# Altium PCB 四轴0617.PcbDoc
Units mm, origin at the board's own origin, x right, y up, seen from the top; angles counter-clockwise.
Board outline 152.4 x 101.6 mm, 2 copper layers (Top Layer, Bottom Layer); 70 components, 44 nets, 226 pads, 102 vias.
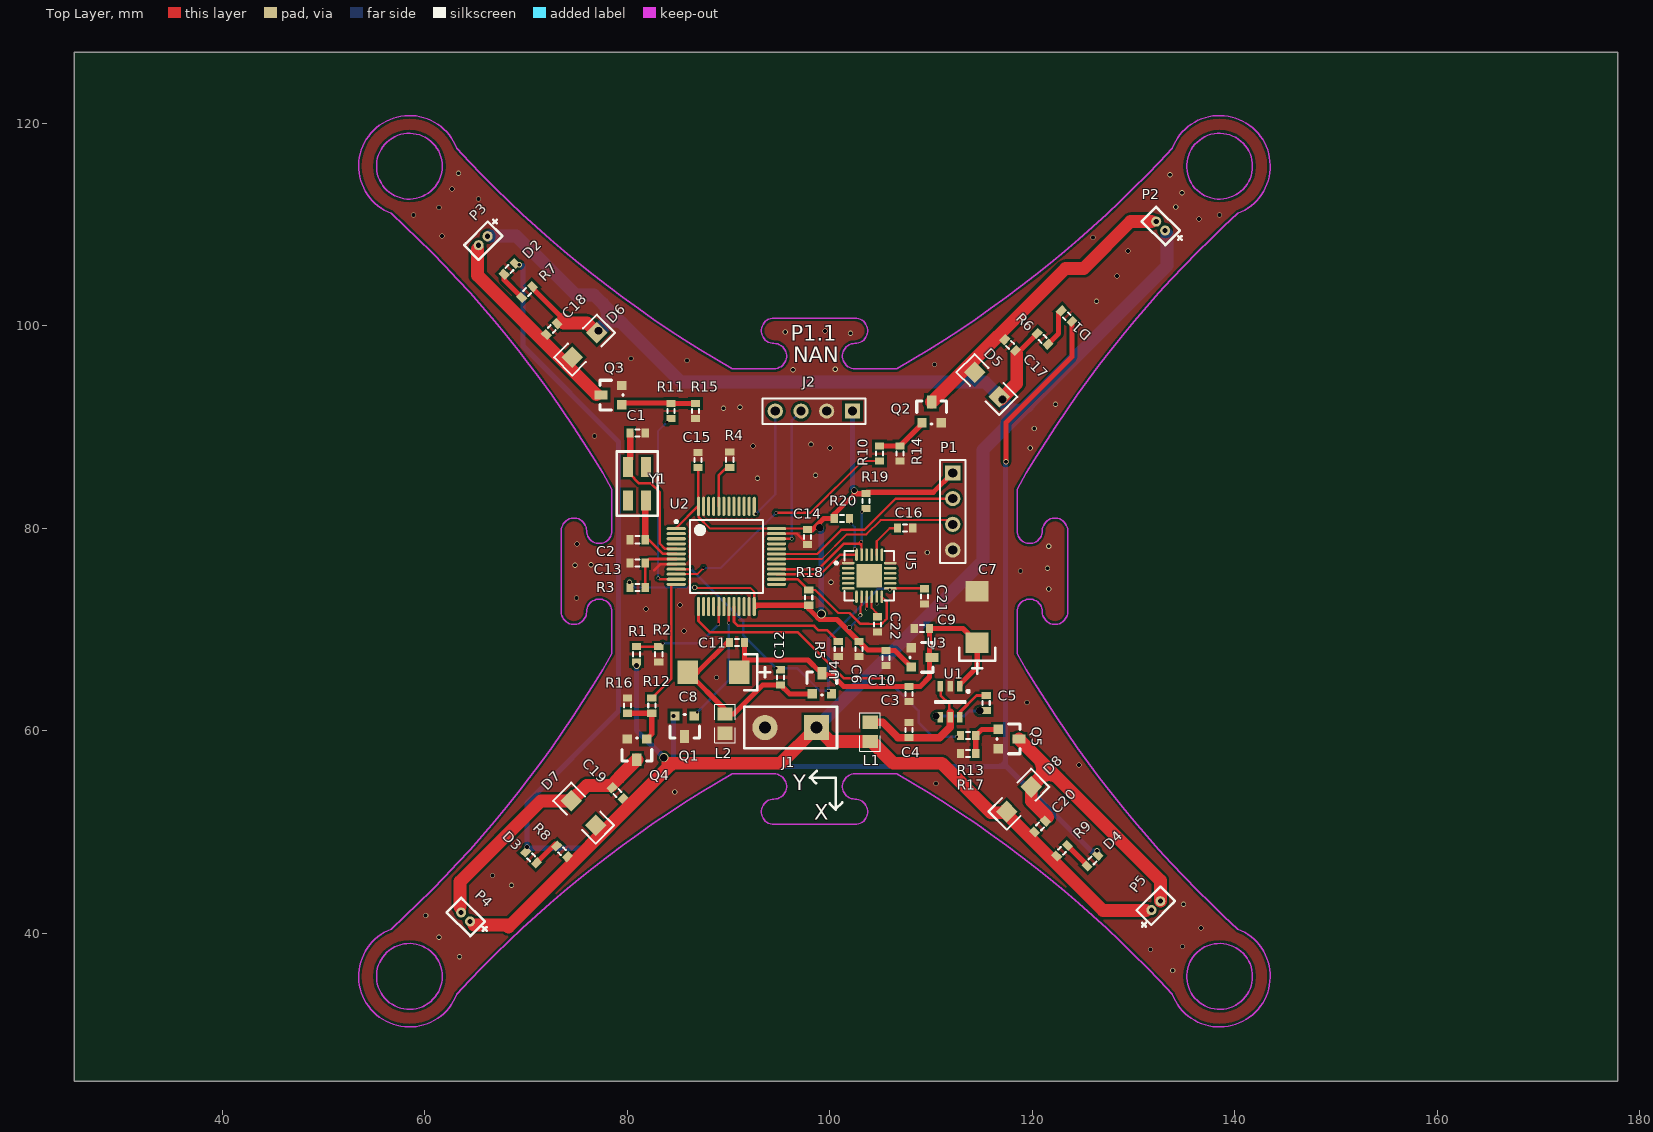
[diagram p0: Top Layer view]
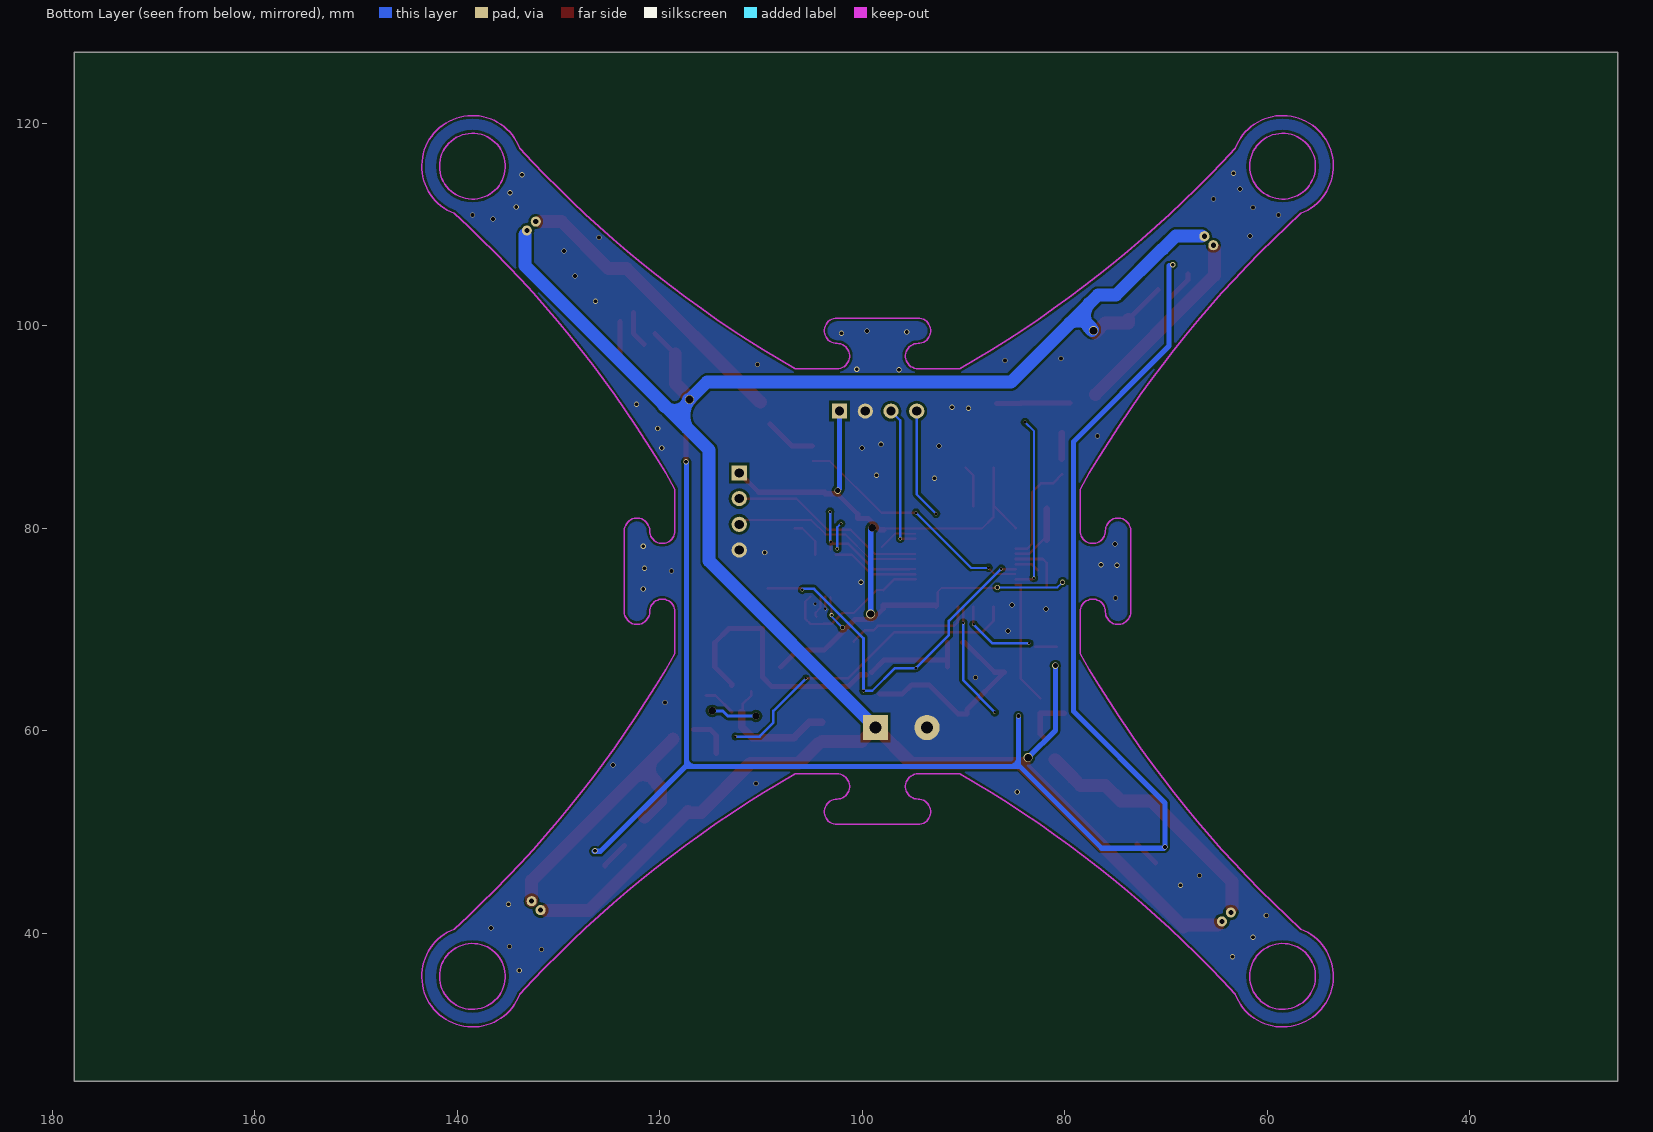
[diagram p1: Bottom Layer view, seen from below]

## Layer stack, top to bottom
Top Layer: signal copper 0.0356
Dielectric: dielectric 0.32, FR-4, Dk 4.8
Bottom Layer: signal copper 0.0356

## Board outline
25.4,25.4 177.8,25.4 177.8,127 25.4,127

## Design rules (kind name [scope] priority, off if disabled: settings)
Clearance [All] p1: gap=0.254
PolygonConnect [All] p1: connectstyle=Direct reliefconductorwidth=0.254 reliefentries=4 polygonreliefangle="90 Angle" airgapwidth=0.254
RoutingVias [All] p1: holewidth=0.711 width=1.27 viastyle="Through Hole" minholewidth=0.711 minwidth=1.27 maxholewidth=0.711 maxwidth=1.27
SolderMaskExpansion [All] p1: expansion=0.102
Width [All] p1: maxlimit=2.54 minlimit=0.127 preferedwidth=0.254
28 further rules are at their usual default settings.

## Components (designator, comment, footprint, x,y, rotation, side; value= is the part's Value field where it differs from the comment)
C1 "Cap" J1-0603 81.026,89.408 r180 top
C2 "Cap" J1-0603 81.026,78.867 r0 top
C3 "Cap" J1-0603 107.814,63.627 r90 top
C4 "Cap" J1-0603 107.814,60.071 r270 top
C5 "Cap" J1-0603 115.443,62.738 r90 top
C6 "Cap" J1-0603 102.87,68.072 r90 top
C7 "16v" 6032 114.554,68.707 r90 top
C8 "16V" 6032 91.059,65.786 r180 top
C9 "Cap" J1-0603 109.093,70.104 r0 top
C10 "Cap" J1-0603 105.537,67.183 r90 top
C11 "Cap" J1-0603 90.83,68.732 r0 top
C12 "Cap" J1-0603 95.123,65.278 r90 top
C13 "Cap" J1-0603 81.026,76.581 r180 top
C14 "Cap" J1-0603 97.79,79.146 r90 top
C15 "Cap" J1-0603 86.995,86.741 r270 top
C16 "Cap" J1-0603 107.442,80.01 r0 top
C17 "Cap" J1-0603 117.805,98.095 r315 top
C18 "Cap" J1-0603 72.542,99.67 r45 top
C19 "Cap" J1-0603 79.045,53.848 r315 top
C20 "Cap" J1-0603 120.752,50.546 r225 top
C21 "Cap" J1-0603 109.347,73.279 r90 top
C22 "Cap" J1-0603 104.699,70.51 r270 top
D1 "BLUDE" J1-0603 123.393,100.94 r315 top
D2 "BLUDE" J1-0603 68.377,105.613 r45 top
D3 "BLUDE" J1-0603 70.51,47.498 r135 top
D4 "BLUDE" J1-0603 125.933,47.193 r45 top
D5 "1N4148" 1206 114.3,95.402 r315 top
D6 "1N4148" 1206 74.574,96.876 r45 top
D7 "1N4148" 1206 74.473,53.086 r315 top
D8 "1N4148" 1206 119.888,54.458 r225 top
J1 "Battery" DIP2-5.08 98.679,60.325 r180 top
J2 "Header 4" HDR1X4 102.235,91.567 r180 top
L1 "Res1" 0805-1 103.988,59.893 r270 top
L2 "Res1" 0805-1 89.662,60.706 r270 top
P1 "Header 4" HDR1X4 112.141,85.471 r270 top
P2 "Header 2" DIP2-1.25 132.232,110.287 r315 top
P3 "Header 2" DIP2-1.25 65.329,107.95 r45 top
P4 "Header 2" DIP2-1.25 63.602,42.062 r315 top
P5 "Header 2" DIP2-1.25 132.639,43.18 r225 top
Q1 "8550" SOT23-8550 85.852,60.579 r180 top
Q2 "AO3402" SOT-23 110.109,92.456 r0 top
Q3 "AO3402" SOT-23 77.419,93.218 r90 top
Q4 "AO3402" SOT-23 80.899,57.15 r180 top
Q5 "AO3402" SOT-23 118.669,59.131 r270 top
R1 "Res1" J1-0603 80.924,67.564 r270 top
R2 "Res1" J1-0603 83.109,67.564 r90 top
R3 "Res1" J1-0603 81.026,74.168 r0 top
R4 "Res1" J1-0603 90.119,86.766 r270 top
R5 "Res1" J1-0603 100.838,68.072 r90 top
R6 "Res1" J1-0603 121.006,98.704 r135 top
R7 "Res1" J1-0603 70.104,103.327 r45 top
R8 "Res1" J1-0603 73.558,48.108 r315 top
R9 "Res1" J1-0603 122.936,48.158 r225 top
R10 "Res1" J1-0603 104.902,87.376 r270 top
R11 "Res1" J1-0603 84.328,91.579 r270 top
R12 "Res1" J1-0603 82.423,62.484 r90 top
R13 "Res1" J1-0603 113.665,59.538 r180 top
R14 "Res1" J1-0603 106.934,87.376 r90 top
R15 "Res1" J1-0603 86.741,91.579 r90 top
R16 "Res1" J1-0603 80.01,62.484 r270 top
R17 "Res1" J1-0603 113.665,57.76 r0 top
R18 "Res1" J1-0603 97.917,73.152 r90 top
R19 "Res1" J1-0603 103.581,82.702 r270 top
R20 "Res1" J1-0603 101.194,80.975 r0 top
U1 "LTC3200ES6-5" SOT95P245X110-6N 111.887,62.865 r270 top
U2 "TM32F103C8T6" LQFP48 89.789,77.216 r0 top
U3 "XC6202" SOT-23-NO 108.814,67.31 r270 top
U4 "XC6202" SOT-23-NO 99.162,64.414 r0 top
U5 "MPU6050-ALL" QFN50P440X440X80-24N 103.886,75.311 r0 top
Y1 "16MHz" 3225--crystal 79.705,84.023 r270 top

## Footprints (in the part's own frame and the unit in brackets; to place one, negate y for a bottom-side part, rotate by r counter-clockwise, add the part's x,y. Pads: shape width x height; smd on the part's side, far side on the other; paste and mask are expansions set on the pad)
0805-1 [mm] "贴片带丝印"
  rect 1.3x1.5 smd: 1(-0.95,0) 2(0.95,0)
  silkscreen extent -1.91,-1.02 1.91,1.02, body extent -1.14,-0.51 1.14,0.51, height 1
1206 [mil]
  rect 60x60 smd: 1(0,0) 2(135,0)
  silkscreen extent -50,-50 185,50
3225--crystal [mm]
  rect 2x1 smd: 1(-2.032,0.381) 2(1.27,2.159) ""(-2.032,2.159) ""(1.27,0.381)
  silkscreen extent -3.56,-0.76 2.79,3.3
6032 [mm]
  rect 2.03x2.28 smd: 1(0,0) 2(5.08,0)
  silkscreen extent -3.05,-1.78 -0.51,1.78
DIP2-1.25 [mm]
  round 1 hole 0.5: 1(0,0) 2(1.25,0)
  silkscreen extent -1.02,-1.02 3.05,1.02
DIP2-5.08 [mm]
  rect 2.5x2.5 hole 1.2: 1(0,0)
  round 2.5 hole 1.2: 2(5.08,0)
  silkscreen extent -2.03,-2.03 7.11,2.03
HDR1X4 [mm] "Connector; Header; 4 Position"
  rect 1.5x1.5 hole 0.9: 1(0,0)
  round 1.5 hole 0.9: 2(2.54,0) 3(5.08,0) 4(7.62,0)
  silkscreen extent -1.27,-1.27 8.89,1.27
J1-0603 [mm] "Chip Resistor, Body 1.6x0.8mm, IPC High Density"
  rect 0.7x0.9 smd: 1(-0.75,0) 2(0.75,0)
  silkscreen extent -0.2,-0.35 0.2,0.35, body extent -0.85,-0.48 0.85,0.48, height 0.9
LQFP48 [mm] "SQFP, 48-Leads, Body 7.00x7.00mm, Pitch 0.50mm, IPC Medium Density"
  oval 1.9x0.3 smd mask+0.09: 1(-4.95,2.75) 2(-4.95,2.25) 3(-4.95,1.75) 5(-4.95,0.75) 7(-4.95,-0.25) 9(-4.95,-1.25) 11(-4.95,-2.25) 26(4.95,-2.25) 28(4.95,-1.25) 30(4.95,-0.25) 32(4.95,0.75) 34(4.95,1.75) 36(4.95,2.75)
  oval 1.9x0.3 smd: 4(-4.95,1.25) 6(-4.95,0.25) 8(-4.95,-0.75) 10(-4.95,-1.75) 12(-4.95,-2.75) 25(4.95,-2.75) 27(4.95,-1.75) 29(4.95,-0.75) 31(4.95,0.25) 33(4.95,1.25) 35(4.95,2.25)
  oval 0.3x1.9 smd: 13(-2.75,-4.95) 15(-1.75,-4.95) 17(-0.75,-4.95) 19(0.25,-4.95) 21(1.25,-4.95) 23(2.25,-4.95) 38(2.25,4.95) 40(1.25,4.95) 42(0.25,4.95) 44(-0.75,4.95) 46(-1.75,4.95) 48(-2.75,4.95)
  oval 0.3x1.9 smd mask+0.09: 14(-2.25,-4.95) 16(-1.25,-4.95) 18(-0.25,-4.95) 20(0.75,-4.95) 22(1.75,-4.95) 24(2.75,-4.95) 41(0.75,4.95) 43(-0.25,4.95) 45(-1.25,4.95) 47(-2.25,4.95)
  oval 0.3x1.9 smd mask+0.082: 37(2.75,4.95) 39(1.75,4.95)
  silkscreen extent -5.07,-3.6 3.6,3.6, body extent -3.5,-3.5 3.5,3.5, height 2.45
QFN50P440X440X80-24N [mm]
  oval 1.25x0.25 smd: 1(-2.075,1.25) 2(-2.075,0.75) 3(-2.075,0.25) 4(-2.075,-0.25) 5(-2.075,-0.75) 6(-2.075,-1.25) 13(2.075,-1.25) 14(2.075,-0.75) 15(2.075,-0.25) 16(2.075,0.25) 17(2.075,0.75) 18(2.075,1.25)
  oval 0.25x1.25 smd: 7(-1.25,-2.075) 8(-0.75,-2.075) 9(-0.25,-2.075) 10(0.25,-2.075) 11(0.75,-2.075) 12(1.25,-2.075) 19(1.25,2.075) 20(0.75,2.075) 21(0.25,2.075) 22(-0.25,2.075) 23(-0.75,2.075) 24(-1.25,2.075)
  rect 2.5x2.3 smd: ""(0,0)
  silkscreen extent -3.37,-2.45 2.45,2.45
SOT23-8550 [mil]
  rect 36x36 smd: 1(45,-35) 2(-30,-35)
  rect 36x50 smd: 3(8,45)
  silkscreen extent -50,-40 65,50
SOT95P245X110-6N [mm] "SOT23, 6-Leads, Body 2.90x2.45mm, Pitch 0.95mm, IPC Medium Density"
  rect 1.05x0.55 smd: 1(-1.524,0.94) 2(-1.524,0) 3(-1.524,-0.965) 4(1.524,-0.965) 5(1.524,0) 6(1.524,0.965)
  silkscreen extent -1.15,-1.5 0.1,1.9, body extent -0.7,-1.5 0.7,1.5, height 1.1
SOT-23 [mil]
  rect 36x36 smd: 1(-40,-80) 3(35,-80)
  rect 36x50 smd: 2(-2,0)
  silkscreen extent -60,-85 55,5
SOT-23-NO [mil]
  rect 36x36 smd: 1(40,-30) 3(-35,-30)
  rect 36x50 smd: 2(3,50)
  silkscreen extent -55,-35 60,55

## Part data
C1 C2 C3 C4 C5 C6 C9 C10 C11 C12 C13 C14 C15 C16 C17 C18 C19 C20 C21 C22: "Capacitor"
C7 C8: library part "Cap Pol2", "Polarized Capacitor (Axial)"
D1 D2 D3 D4: library part LED0, "Typical INFRARED GaAs LED"
D5 D6 D7 D8: library part "Diode 1N4148", "High Conductance Fast Diode"
J1: "Multicell Battery"
J2 P1: "Header, 4-Pin"
L1 L2 R1 R2 R3 R4 R5 R6 R7 R8 R9 R10 R11 R12 R13 R14 R15 R16 R17 R18 R19 R20: "贴片电阻"
P2 P3 P4 P5: "Header, 2-Pin"
Q1: library part QNPN, "NPN Bipolar Transistor"
Q2 Q3 Q4 Q5: library part NMOS-2, "N-Channel Power MOSFET"
U2: library part LQFP48-STM32F103C8T6
Y1: library part XTAL, "Crystal Oscillator"

## Via types
v1: diameter 0.508, hole 0.381, Top Layer to Bottom Layer, 70 vias
v2: diameter 0.305, hole 0.254, Top Layer to Bottom Layer, 22 vias
v3: diameter 0.889, hole 0.762, Top Layer to Bottom Layer, 3 vias
v4: diameter 0.635, hole 0.508, Top Layer to Bottom Layer, 2 vias
v5: diameter 0.711, hole 0.711, Top Layer to Bottom Layer, 2 vias
v6: diameter 0.381, hole 0.254, Top Layer to Bottom Layer, 1 vias
v7: diameter 0.889, hole 0.711, Top Layer to Bottom Layer, 1 vias
v8: diameter 0.762, hole 0.711, Top Layer to Bottom Layer, 1 vias

## Nets (pads, with @x,y where several pads share a name; then routed paths per layer and width w, separated by ;. In a path a pad name is that pad's centre, name@x,y a point inside that pad or via, vN(x,y) a via of type N, cw(c..) or ccw(c..) an arc to the next point about the centre after c; other vN are vias at no path point)
1_RX: P1.2 U2.31 | length 19.7
  Top Layer w0.229: U2.31 98.751,77.466 101.143,79.858 103.429,79.858 106.502,82.931 P1.2
1_TX: P1.3 U2.30 | length 19.2
  Top Layer w0.178: U2.30 99.23,76.966 101.665,79.4 103.618,79.4 105.021,80.803 111.729,80.803 P1.3
3.3V: C6.2 C10.2 C14.2 C15.2 J2.1 P1.1 R3.1 R18.1 R19.1 R20.1 U2.1 U2.24 U2.36 U2.48 U3.1 U5.8 | length 88.2
  Top Layer w0.203: U2.1@84.839,79.972 U2.1@84.839,80.048 ; v1@86.665,74.117 86.69,74.092 92.177,74.092 92.539,73.729 U2.24 ; C15.2 C15.2@86.995,86 ; U2.48@87.033,82.166 87.033,81.115 88.182,79.966 U2.36 ; U2.36@94.739,79.972 97.625,79.972 C14.2@97.808,79.788 ; v6(103.022,71.425) 103.022,72.288 103.136,72.402 U5.8
  Top Layer w0.254: U2.1@84.839,80.048 86.995,82.204 C15.2
  Top Layer w0.508: 92.697,72.266 92.833,72.402 R18.1 97.917,72.06 98.806,71.171 ; C14.2@97.841,79.858 98.285,79.858 99.402,80.975 R20.1 100.444,81.394 102.464,83.414 R19.1@103.683,83.414 ; 98.99,70.987 100.705,70.987 101.746,69.946 C6.2 102.888,68.822 103.74,67.97 105.5,67.97 C10.2 106.413,67.933 U3.1 ; R19.1 103.682,83.553 110.223,83.553 P1.1
  Bottom Layer w0.203: v1@80.315,74.574 80.721,74.168 v1(86.665,74.168) ; v1(101.956,70.206) 103.073,71.323 v6@103.073,71.577
  Bottom Layer w0.508: v7(99.162,71.526) v8@99.162,79.959 ; J2.1 102.235,83.896 v4(102.413,83.718)
  other v1: 80.213,74.676
  other v8: 99.009,80.061
3_RX: U2.22
3_TX: U2.21
5V: C3.2 C7.1 C8.1 C9.2 C11.2 U1.1 U3.2 U4.2 | length 36.5
  Top Layer w0.508: C8.1@91.58,66.307 C11.2 ; 91.592,67.005 97.841,67.005 U4.2@99.06,65.786 ; U4.2@99.644,65.532 100.228,65.532 101.383,64.377 C3.2 108.929,64.377 109.855,65.303 U3.2@109.855,67.234 ; U3.2@109.843,67.246 C9.2 113.157,70.104 C7.1 114.554,66.294 112.878,64.618 U1.1@112.878,64.465
6050_INT: R18.2 U2.26 U5.12 | length 15.3
  Top Layer w0.178: 96.853,74.966 96.854,74.965
  Top Layer w0.229: R18.2 98.564,73.902 100.838,71.628 101.956,71.628 103.022,70.561 103.874,70.561 103.893,70.542 105.098,70.542 105.227,70.671 105.484,70.928 105.613,71.057 105.613,72.759 U5.12
  Top Layer w0.254: U2.26 96.853,74.966 ; 96.853,74.964 96.855,74.964 R18.2
6050_SCL: R19.2 U2.28 U5.23 | length 13
  Top Layer w0.178: U2.28 U2.28@95.301,75.966
  Top Layer w0.229: U2.28@95.301,75.966 98.877,75.966 101.397,78.486 102.718,78.486 102.881,78.486 103.138,78.486 103.138,78.283 U5.23@103.138,77.851
  Bottom Layer w0.254: v2@103.175,78.74 v2(103.175,81.636)
  other v2: 103.124,78.689
6050_SDA: R20.2 U2.27 U5.24 | length 11.3
  Top Layer w0.127: U2.27 U2.27@94.746,75.466
  Top Layer w0.229: U2.27@94.746,75.459 99.081,75.459 101.008,77.386 U5.24
  Bottom Layer w0.229: v2(102.108,80.467) 102.464,80.112 v2(102.464,77.978)
AD_VBT: R1.1 R2.2 U2.17 | length 10.1
  Top Layer w0.254: R1.1@80.772,68.314 R2.2@82.931,68.314 ; v2@89.039,70.548 U2.17
  Bottom Layer w0.254: v2(83.515,68.631) 87.122,68.631 v2(89.002,70.51)
BOOT0: R4.2 U2.44 | length 4.1
  Top Layer w0.254: U2.44 89.039,85.241 R4.2@89.789,85.991
BOOT1: R5.2 U2.20 | length 12.6
  Top Layer w0.254: U2.20 90.539,70.751 90.932,70.358 98.45,70.358 98.857,69.952 99.708,69.952 R5.2
CTRL_M1: R10.2 U2.10 | length 24.6
  Top Layer w0.203: U2.10@84.89,75.466 86.896,75.466 v2@87.503,76.073 ; v2(94.691,81.534) 98.095,81.534 103.187,86.626 R10.2
  Bottom Layer w0.203: v2(87.528,76.098) 89.256,76.098 v2(94.691,81.534)
CTRL_M2: R11.2 U2.11 | length 17.5
  Top Layer w0.203: v2@83.109,75.032 83.174,74.966 U2.11
  Bottom Layer w0.203: v2(83.058,75.082) 83.058,89.611 v2@83.896,90.449
  other v2: 83.922,90.475
CTRL_M3: R12.2 U2.12 | length 12.5
  Top Layer w0.254: R12.2 84.328,65.139 84.328,74.422 84.341,74.435 U2.12@84.839,74.435
CTRL_M4: R13.2 U2.13 | length 32.2
  Top Layer w0.254: U2.13 87.039,70.847 88.138,69.748 96.825,69.748 101.397,65.176 v2@105.512,65.176
  Bottom Layer w0.254: v2(105.562,65.176) 108.763,61.976 108.763,60.808 110.134,59.436 v2@112.471,59.436
  other v2: 112.522,59.436
GND: C1.1 C2.1 C3.1 C4.1 C6.1 C7.2 C9.1 C10.1 C13.2 C14.1 C15.1 C16.2 C21.1 C22.2 J1.2 J2.2 L2.2 P1.4 Q1.3 Q2.3 Q3.3 Q4.3 Q5.3 R2.1 R4.1 R5.1 R14.1 R15.1 R16.1 R17.1 U1.2 U2.8 U2.23 U2.35 U2.47 U3.3 U5.1 U5.9 U5.11 U5.18 | length 7.5
  Top Layer w0.178: U2.35 95.754,79.466
  Top Layer w0.203: 95.754,79.466 96.759,79.466 C14.1@98.076,78.149
  Top Layer w0.254: 82.652,75.844 83.273,76.466 U2.8 ; v2(103.636,72.038) U5.9
  other v1: 133.858,36.322 63.449,37.694 131.674,38.405 134.823,38.71 61.417,39.624 136.652,40.538 60.096,41.758 134.925,42.875 68.58,44.755 66.7,45.72 84.684,53.95 110.49,54.813 124.612,56.642 119.482,62.789 88.798,65.278 85.598,69.85 81.839,72.034 85.192,72.441 74.981,73.101 121.615,74.016 100.127,74.676 118.821,75.794 121.514,76.048 74.828,76.352 76.403,76.403 109.626,77.622 121.615,78.232 75.032,78.435 92.862,84.938 98.603,85.242 100.025,87.935 119.786,87.935 92.405,88.138 98.146,88.29 76.759,89.103 120.193,89.865 89.51,91.846 91.135,91.948 122.276,92.253 96.368,95.656 100.533,95.707 110.338,96.164 85.903,96.571 80.366,96.774 102.057,99.263 95.606,99.365 99.517,99.466 126.34,102.413 128.372,104.902 129.438,107.391 125.984,108.712 61.722,108.864 136.449,110.541 58.877,110.947 138.481,110.947 61.417,111.658 134.163,111.709 65.329,112.522 134.772,113.132 62.687,113.487 133.604,114.91 63.348,115.062
  other v2: 104.648,72.542
LED: Q1.2 U2.19 | length 11.5
  Top Layer w0.254: v2@90.039,70.794 U2.19
  Bottom Layer w0.254: v2@86.919,61.874 90.018,64.973 v2(90.018,70.663)
  other v2: 86.919,61.824
M1: C17.1 D5.1 P2.1 Q2.2 | length 29.1
  Top Layer w1.27: Q2.2 123.266,105.664 125.07,105.664 129.692,110.287 P2.1@131.775,110.287
M2: C18.1 D6.1 P3.1 Q3.2 | length 19.2
  Top Layer w1.27: P3.1@65.227,107.594 65.227,104.953 Q3.2@76.962,93.218
M3: C19.1 D7.1 P4.1 Q4.2 | length 24.9
  Top Layer w1.27: 63.5,42.621 63.5,45.11 71.476,53.086 D7.1 75.997,54.61 78.435,54.61 79.172,55.347 79.172,55.372 Q4.2
M4: C20.1 D8.1 P5.1 Q5.2 | length 29.1
  Top Layer w1.27: Q5.2 122.479,55.372 ; D8.1 119.888,53.086 121.514,51.46 ; 120.817,56.954 cw(c119.38,56.236) 120.716,55.344 cw(c121.615,54.254) 122.479,55.372 ; P5.1 132.639,45.212 122.479,55.372
NetC4_2: C4.2 L1.1 U1.3 U1.5 | length 12.9
  Top Layer w0.254: U1.3@110.937,63.89 110.937,63.501 111.811,62.627 111.811,61.916 U1.5@111.887,61.84
  Top Layer w0.762: L1.1 105.222,60.843 106.744,59.321 C4.2 110.832,59.321 111.887,60.376 U1.5@111.887,61.84
NetC5_1: C5.1 U1.4 | length 4.5
  Bottom Layer w0.305: v5(110.49,61.468) 113.284,61.468 113.792,61.976 v5(114.808,61.976)
NetC5_2: C5.2 U1.6 | length 3.3
  Top Layer w0.305: U1.6@112.837,61.84 114.485,63.488 C5.2
NetC8_2: C8.2 C11.1 C12.1 L2.1 U4.3 | length 21.2
  Top Layer w0.508: C11.1 89.865,68.732 86.919,65.786 C8.2 89.662,62.103 L2.1 90.51,61.656 93.382,64.528 C12.1 95.136,64.528 96.012,63.652 U4.3@98.298,63.652
NetC16_1: C16.1 U5.20 | length 3.9
  Top Layer w0.229: U5.20 104.636,78.716 105.93,80.01 C16.1
NetC22_1: C22.1 U5.10 | length 2.2
  Top Layer w0.203: U5.10 104.136,72.14 104.597,71.679 104.597,71.362 C22.1@104.496,71.26
NetD1_1: D1.1 R6.1 | length 3.6
  Top Layer w0.508: R6.1 122.58,99.219 D1.1@122.58,101.295
NetD1_2: D1.2 D2.2 D3.2 D4.2 Q1.1 | length 182
  Top Layer w0.508: v1(117.399,86.563) 117.399,90.424 123.901,96.926 123.901,100.387 D1.2
  Bottom Layer w0.254: 84.708,57.367 ccw(c85.344,57.252) 85.344,56.605 ; 116.456,56.62 ccw(c116.602,57.25) 117.246,57.201
  Bottom Layer w0.508: 69.698,105.918 69.698,97.993 79.146,88.544 79.146,61.925 70.104,52.883 v1(70.104,48.514) ; v1@70.206,48.463 70.206,48.412 76.352,48.412 84.582,56.642 v1(84.582,61.468) ; 84.43,56.49 117.45,56.49 125.832,48.108 v1@126.492,48.108 ; 117.348,56.54 v1@117.348,86.512
  other v1: 126.39,48.158 69.342,106.02
NetD2_1: D2.1 R7.1 | length 3
  Top Layer w0.508: D2.1 67.846,104.524 R7.1
NetD3_1: D3.1 R8.1 | length 2.6
  Top Layer w0.508: D3.1 R8.1@72.87,48.796
NetD4_1: D4.1 R9.1 | length 2.8
  Top Layer w0.508: R9.1 125.403,46.752 D4.1
NetQ2_1: Q2.1 R10.1 R14.2 | length 5.1
  Top Layer w0.508: R10.1 R14.2 Q2.1@109.093,90.285
NetQ3_1: Q3.1 R11.1 R15.2 | length 7.2
  Top Layer w0.508: Q3.1@79.502,92.354 84.303,92.354 R11.1 R15.2
NetQ4_1: Q4.1 R12.1 R16.2 | length 5.2
  Top Layer w0.508: R16.2 R12.1 82.423,59.69 Q4.1
NetQ5_1: Q5.1 R13.1 R17.2 | length 4.3
  Top Layer w0.508: R17.2 R13.1 115.025,60.147 Q5.1
OSC_IN: C1.2 U2.5 Y1.1 | length 13.2
  Top Layer w0.254: Y1.1@80.264,85.344 81.178,84.43 82.347,84.43 83.21,83.566 83.21,79.299 83.208,79.302 83.208,78.502 83.743,77.966 U2.5
  Top Layer w0.635: Y1.1@80.276,86.856 C1.2
OSC_OUT: C2.2 U2.6 Y1.2 | length 6.6
  Top Layer w0.254: C2.2@81.939,79.043 83.494,77.488 ; 83.516,77.466 U2.6
  Top Layer w0.635: C2.2 Y1.2@81.776,81.927
RSET: C13.1 R3.2 U2.7 | length 5.6
  Top Layer w0.254: R3.2 C13.1 82.161,76.966 U2.7
SWCLK: J2.4 U2.37 | length 10.9
  Bottom Layer w0.229: v2(92.71,81.432) 94.615,83.337 J2.4
SWDIO: J2.3 U2.34 | length 14.5
  Top Layer w0.229: U2.34 v2(96.243,78.966)
  Bottom Layer w0.229: v2(96.243,78.966) 96.243,90.655 J2.3
VBT: C17.2 C18.2 C19.2 C20.2 D5.2 D6.2 D7.2 D8.2 J1.1 L1.2 P2.2 P3.2 P4.2 P5.2 R1.2 R6.2 R7.2 R8.2 R9.2 | length 238.3
  Top Layer w0.508: R7.2@70.787,103.559 73.711,100.635 ; C17.2 118.805,97.564 R6.2
  Top Layer w1.27: 64.872,40.843 68.072,40.843 ; 68.275,40.64 84.226,56.591 ; 73.711,100.635 73.711,100.279 76.02,100.279 D6.2 ; 84.023,56.794 95.148,56.794 J1.1 100.061,58.943 L1.2 ; L1.2@104.292,58.776 106.274,56.794 111.049,56.794 115.926,51.918 D8.2@117.094,51.918 ; D5.2@116.928,92.775 118.466,94.312 C17.2@118.466,97.231 ; D8.2@117.209,52.033 126.977,42.266 131.216,42.266
  Bottom Layer w0.508: v4@80.924,66.497 80.924,60.046 v3(83.617,57.353)
  Bottom Layer w1.27: P3.2@66.446,108.864 69.037,108.864 70.307,107.594 70.358,107.594 74.93,103.022 76.708,103.022 79.429,100.302 ; v3@77.27,99.597 cw(c78.689,98.908) 77.881,100.263 ; 77.724,102.006 cw(c76.2,100.99) 77.881,100.263 ; J1.1 115.113,76.759 115.113,87.732 133.299,105.918 P2.2@133.299,109.017 ; v3(117.043,92.71) 115.316,94.437 85.293,94.437 79.429,100.302 ; v3@117.145,92.71 ccw(c118.516,93.066) 119.686,92.265 ; v3@117.268,92.407 cw(c115.062,91.135) 117.297,89.916 ; 77.881,100.263 cw(c78.689,98.908) 79.429,100.302
  other v3: 77.165,99.517
  other v4: 80.924,66.446
VSCN: C12.2 C21.2 U2.9 U4.1 U5.13 | length 37.5
  Top Layer w0.254: U2.9 86.228,75.966 v2(86.258,75.997) ; U5.13 C21.2@109.315,74.061
  Bottom Layer w0.254: v2@86.309,75.997 91.44,70.866 91.44,69.444 v2(94.691,66.192) ; v2@94.64,66.192 96.774,66.192 99.009,63.957 v2(99.873,63.957) 99.873,69.139 104.75,74.016 v2@105.918,74.016
  other v2: 105.918,73.914
pads on no net: U2.2 U2.3 U2.4 U2.14 U2.15 U2.16 U2.18 U2.25 U2.29 U2.32 U2.33 U2.38 U2.39 U2.40 U2.41 U2.42 U2.43 U2.45 U2.46 U5. U5.2 U5.3 U5.4 U5.5 U5.6 U5.7 U5.14 U5.15 U5.16 U5.17 U5.19 U5.21 U5.22 Y1.
copper on no net: | length 4.4
  Top Layer w0.229: 102.718,78.486 ccw(c102.718,78.892) 103.081,78.711 ; 102.871,78.489 cw(c102.768,78.08) 102.881,78.486 cw(c102.768,78.08) 103.138,78.283
  Top Layer w1.27: 120.281,54.718 cw(c121.615,54.254) 120.426,55.016 ; 120.294,54.915 ccw(c119.38,56.236) 120.426,55.016 ; 122.479,55.372 cw(c121.615,54.254) 122.733,55.118 ; 120.426,55.016 cw(c121.615,54.254) 120.716,55.344 cw(c119.38,56.236) 120.426,55.016
  Bottom Layer w1.27: 77.308,99.532 ccw(c76.2,100.99) 77.881,100.263 ; 77.591,102.182 cw(c76.2,100.99) 77.724,102.006 ; 79.429,100.302 cw(c78.689,98.908) 79.553,100.228 ; 117.04,92.713 cw(c118.516,93.574) 116.999,92.787 cw(c115.062,91.135) 117.268,92.407

## Polygon pours and split planes (outlines as drawn)
GND on Bottom Layer "Bottom Layer-No Net" (solid, remove dead copper, pour order 3): 43.351,122.259 43.758,122.665 149.727,122.665 149.727,36.915 141.091,28.279 140.684,27.872 41.116,27.872
GND on Top Layer "Bottom Layer-No Net" (solid, remove dead copper, pour order 5): 44.977,122.817 150.285,122.817 150.539,123.071 146.374,118.906 146.374,27.11 42.996,27.11 42.843,26.958

## Keep-outs
Keep-Out Layer:
  circle w0.127: c138.487,115.755 r3.25
  circle w0.127: c58.487,35.755 r3.25
  circle w0.127: c58.487,115.755 r3.25
  circle w0.127: c138.487,35.755 r3.25
  lines w0.127: 56.704,40.426 ccw(c-20.068,124.216) 78.487,67.633 78.487,71.755 ccw(c77.237,71.755) 75.987,71.755 cw(c74.737,71.755) 73.487,71.755 73.487,75.755 73.487,79.755 cw(c74.737,79.755) 75.987,79.755 ccw(c77.237,79.755) 78.487,79.755 78.487,83.876 ccw(c-20.068,27.293) 56.704,111.084 cw(c58.487,115.755) 63.158,117.538 ccw(c146.949,194.31) 90.366,95.755 94.487,95.755 ccw(c94.487,97.005) 94.487,98.255 cw(c94.487,99.505) 94.487,100.755 98.487,100.755 102.487,100.755 cw(c102.487,99.505) 102.487,98.255 ccw(c102.487,97.005) 102.487,95.755 106.609,95.755 ccw(c50.026,194.31) 133.816,117.538 cw(c138.487,115.755) 140.271,111.084 ccw(c217.042,27.293) 118.487,83.876 118.487,79.755 ccw(c119.737,79.755) 120.987,79.755 cw(c122.237,79.755) 123.487,79.755 123.487,75.755 123.487,71.755 cw(c122.237,71.755) 120.987,71.755 ccw(c119.737,71.755) 118.487,71.755 118.487,67.633 ccw(c217.042,124.216) 140.271,40.426 cw(c138.487,35.755) 133.816,33.971 ccw(c50.026,-42.8) 106.609,55.755 102.487,55.755 ccw(c102.487,54.505) 102.487,53.255 cw(c102.487,52.005) 102.487,50.755 98.487,50.755 94.487,50.755 cw(c94.487,52.005) 94.487,53.255 ccw(c94.487,54.505) 94.487,55.755 90.366,55.755 ccw(c146.949,-42.8) 63.158,33.971 cw(c58.487,35.755) 56.704,40.426

## Silkscreen, mask and mechanical layers (free items; w line width, h text height)
Top Overlay:
  lines w0.254: 98.654,54.813 98.095,55.372 98.044,55.372 ; 98.704,56.032 98.044,55.372 ; 99.974,52.832 100.584,52.222 ; 101.244,52.934 100.584,52.273 100.584,55.372 98.044,55.372
  text "P1.1" at 96.164,98.501 h1.52
  text "NAN" at 96.368,96.418 h1.52
  text "Y" at 96.368,54.153 h1.52
  text "X" at 98.45,51.206 h1.52